# EAGLE board axoloti_shield_example_cutouts (EAGLE 7.3.0)

Size 160 x 50 mm. Coordinates in mm from the lower left corner, seen from the top.
Outline: 3,0 157,0 arc90 160,3 160,50 152.4,50 152.4,25.4 113.03,25.4 113.03,50 76.2,50 76.2,30.48 68.58,30.48 68.58,50 49.53,50 49.53,33.02 7.62,33.02 7.62,50 3,50 arc90 0,47 0,3 arc90 3,0
Copper layers (1*16): Top 0.035mm / dielectric 1.5mm / Bottom 0.035mm
Design rules "default": minimum track width 10mil, minimum drill 24mil, track to track 8mil, track to pad 8mil, pad to pad 8mil, via to via 8mil, smd to smd 8mil, copper to edge 40mil, drill to drill 8mil, minimum pad ring 10mil, minimum via ring 8mil, stop-mask expansion 4mil, vias tented up to drill 0mil, thermal gap 10mil
Net classes: 0 default: width 0.305 mm

## Footprints (pad centres in the part's own frame; a part is rotated, then mirrored left to right if it is on the bottom)
3,0 = hole 3: 0,0
1X40 = drill 1.016 pad 1.88 square: 1 -49.53,0 | drill 1.016 pad 1.88: 2 -46.99,0; 3 -44.45,0; 4 -41.91,0; 5 -39.37,0; 6 -36.83,0; 7 -34.29,0; 8 -31.75,0; 9 -29.21,0; 10 -26.67,0; 11 -24.13,0; 12 -21.59,0; 13 -19.05,0; 14 -16.51,0; 15 -13.97,0; 16 -11.43,0; 17 -8.89,0; 18 -6.35,0; 19 -3.81,0; 20 -1.27,0; 21 1.27,0; 22 3.81,0; 23 6.35,0; 24 8.89,0; 25 11.43,0; 26 13.97,0; 27 16.51,0; 28 19.05,0; 29 21.59,0; 30 24.13,0; 31 26.67,0; 32 29.21,0; 33 31.75,0; 34 34.29,0; 35 36.83,0; 36 39.37,0; 37 41.91,0; 38 44.45,0; 39 46.99,0; 40 49.53,0

## Placement (x,y rotation side)
H1  MOUNT-HOLE3.0  [3,0]  3.5,10 90 top
H2  MOUNT-HOLE3.0  [3,0]  3.5,40 90 top
H3  MOUNT-HOLE3.0  [3,0]  44,10 90 top
H4  MOUNT-HOLE3.0  [3,0]  54,10 90 top
H5  MOUNT-HOLE3.0  [3,0]  54,40 90 top
H6  MOUNT-HOLE3.0  [3,0]  116,10 90 top
H7  MOUNT-HOLE3.0  [3,0]  156.6,10 90 top
H8  MOUNT-HOLE3.0  [3,0]  156.5,40 90 top
X1  X1  [1X40]  101.6,1.27 0 top

## Library data of the parts
H1-H8 = holes
X1 = SparkFun-Connectors

## Nets
CM: X1.31
GND: X1.6 X1.14 X1.20 X1.28 X1.40
LIN+: X1.34
LIN-: X1.35
PA0: X1.16
PA1: X1.17
PA2: X1.18
PA3: X1.19
PA4: X1.22
PA5: X1.23
PA6: X1.24
PA7: X1.25
PB0: X1.26
PB1: X1.27
PB6: X1.2
PB7: X1.3
PB8: X1.4
PB9: X1.5
PC0: X1.8
PC1: X1.9
PC2: X1.10
PC3: X1.11
PC4: X1.12
PC5: X1.13
RIN+: X1.36
RIN-: X1.37
VDD: X1.7
VDDA: X1.15

## Tracks (layer width: path | path; a pad name or v marks a point on that pad's centre or on a via)
GND  (4 unrouted)

## Text on the board
tDocu: VDD | PB6 | PB7 | PB8 | PB9 | GND | VDD | PC0 | PC1 | PC2 | PC3 | PC4 | PC5 | GND | VDDA | PA0 | PA1 | PA2 | PA3 | GND | VDDA | PA4 | PA5 | PA6 | PA7 | PB0 | PB1 | GND | VDDC | VDDC | CM | GND | GND | LIN+ | LIN- | RIN+ | RIN-